# EAGLE board water ver2.0.0 (EAGLE 9.6.2)
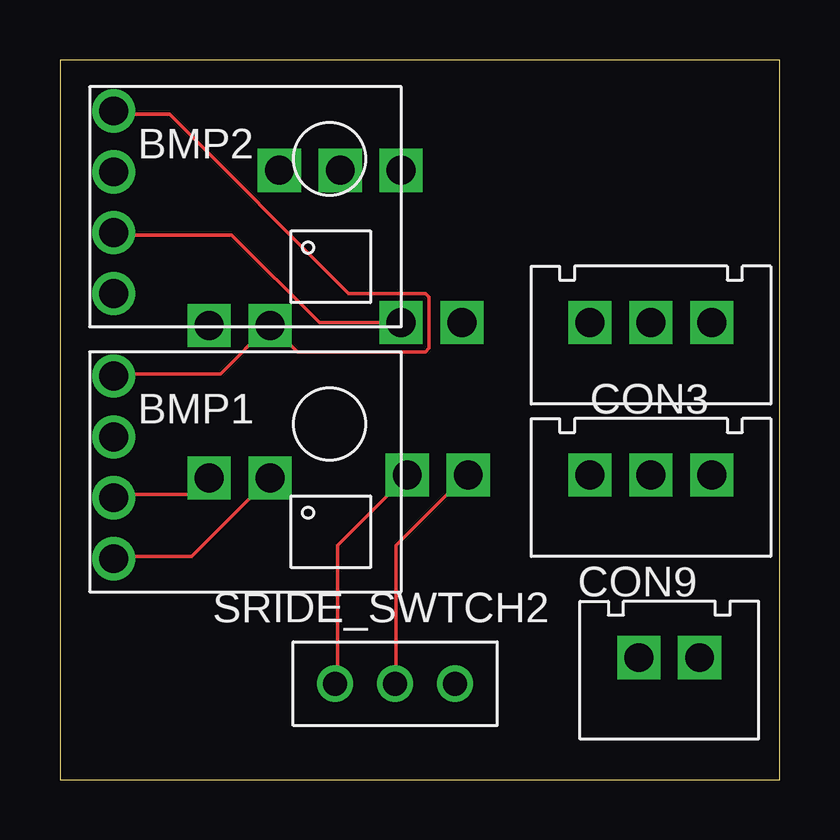
[diagram p0: board, top side]
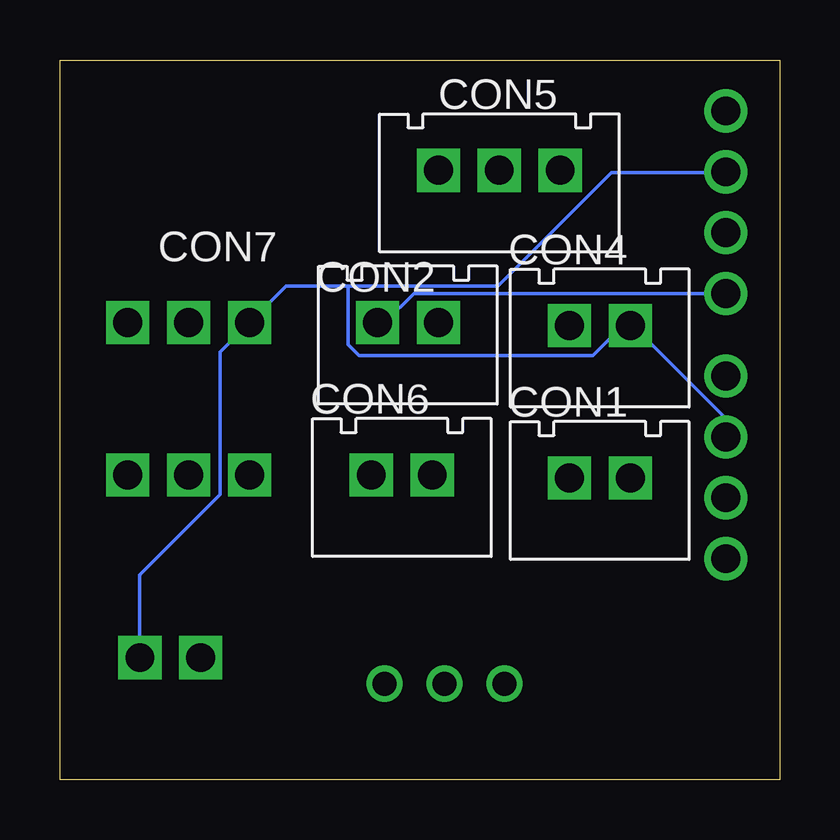
[diagram p1: board, bottom side, seen from below]

Size 30 x 30 mm. Coordinates in mm from the lower left corner, seen from the top.
Outline: 0,0 30,0 30,30 0,30 0,0
Copper layers (1*16): Top 0.035mm / dielectric 1.5mm / Bottom 0.035mm
Design rules "default": minimum track width 6mil, minimum drill 0.35mm, track to track 6mil, track to pad 6mil, pad to pad 6mil, via to via 6mil, smd to smd 6mil, copper to edge 40mil, drill to drill 6mil, minimum pad ring 10mil, minimum via ring 8mil, stop-mask expansion 4mil, vias tented up to drill 0mil, thermal gap 10mil

## Footprints (pad centres in the part's own frame; a part is rotated, then mirrored left to right if it is on the bottom)
GY-68 = drill 1.2: P1 -5,4; P2 -5,1.46; P3 -5,-1.08; P4 -5,-3.62
2PIN = drill 1.2 square: P$1 -1.27,0; P$2 1.27,0
3PIN = drill 1.2 square: P$1 2.54,-2.54; P$2 5.08,-2.54; P$3 7.62,-2.54
SRIDE_SWITCH = drill 1: L -2.5,0; LR 0,0; R 2.5,0

## Placement (x,y rotation side)
BMP1  BMP180  [GY-68]  7.24,12.83 0 top
BMP2  BMP180  [GY-68]  7.24,23.88 0 top
CON1  [2PIN]  7.49,12.57 0 bottom
CON2  [2PIN]  15.49,19.05 0 bottom
CON3  [3PIN]  19.56,15.24 0 top
CON4  [2PIN]  7.49,18.92 0 bottom
CON5  [3PIN]  16.76,27.94 0 bottom
CON6  [2PIN]  15.75,12.7 0 bottom
CON7  [3PIN]  19.56,21.59 0 top
CON9  [2PIN]  25.4,5.08 0 top
SRIDE_SWTCH2  SRIDE_SWITCH  [SRIDE_SWITCH]  13.97,4 0 top

## Library data of the parts
BMP1 BMP2 = BMP180
CON1-CON7 CON9 = XR Connector
SRIDE_SWTCH2 = Sride Switch

## Nets
+3V3: BMP1.P1 BMP2.P1 CON4.P$1
+5V: CON7.P$2
FP: CON9.P$1
GND: BMP1.P2 BMP2.P2 CON4.P$2 CON7.P$1 CON9.P$2
N$3: CON6.P$2 SRIDE_SWTCH2.L
N$4: CON6.P$1 SRIDE_SWTCH2.LR
PWM: CON7.P$3
SCL0: BMP1.P3 CON1.P$2
SCL1: BMP2.P3 CON2.P$2
SDA0: BMP1.P4 CON1.P$1
SDA1: BMP2.P4 CON2.P$1

## Tracks (layer width: path | path; a pad name or v marks a point on that pad's centre or on a via)
+3V3
  Top 0.152: BMP1.P1 2.29,16.92 6.71,16.92 8.69,18.9 CON4.P$1 8.84,18.9 9.91,17.83 15.24,17.83 15.39,17.98 15.39,20.12 15.24,20.27 12.04,20.27 4.57,27.74 2.29,27.74 BMP2.P1
GND
  Bottom 0.152: BMP1.P2 2.29,14.33 2.29,15.09 6.1,18.9 CON4.P$2 6.25,18.9 6.55,18.9 7.77,17.68 17.53,17.68 17.98,18.14 17.98,20.57 | 17.98,20.57 20.57,20.57 CON7.P$1 23.32,17.83 23.32,11.89 26.67,8.53 CON9.P$2 | 17.98,20.57 11.73,20.57 7.01,25.3 2.29,25.3 BMP2.P2
N$3
  Top 0.152: SRIDE_SWTCH2.L 11.58,4.12 11.58,9.75 14.48,12.65 CON6.P$2
N$4
  Top 0.152: SRIDE_SWTCH2.LR 14.02,4.12 14.02,9.75 16.92,12.65 CON6.P$1
SCL0
  Top 0.152: BMP1.P3 2.29,11.89 5.49,11.89 6.1,12.5 CON1.P$2
SCL1
  Top 0.152: CON2.P$2 10.82,19.05 7.16,22.71 2.29,22.71 BMP2.P3
SDA0
  Top 0.152: CON1.P$1 5.49,9.3 2.29,9.3 BMP1.P4
SDA1
  Bottom 0.152: CON2.P$1 16.46,19.05 15.24,20.27 2.29,20.27 BMP2.P4